# EAGLE board LIDAR_Breakout (EAGLE 9.2.2)
AUTHORS: Austin Keener; REV: 1.0; TITLE: LIDAR_BREAKOUT
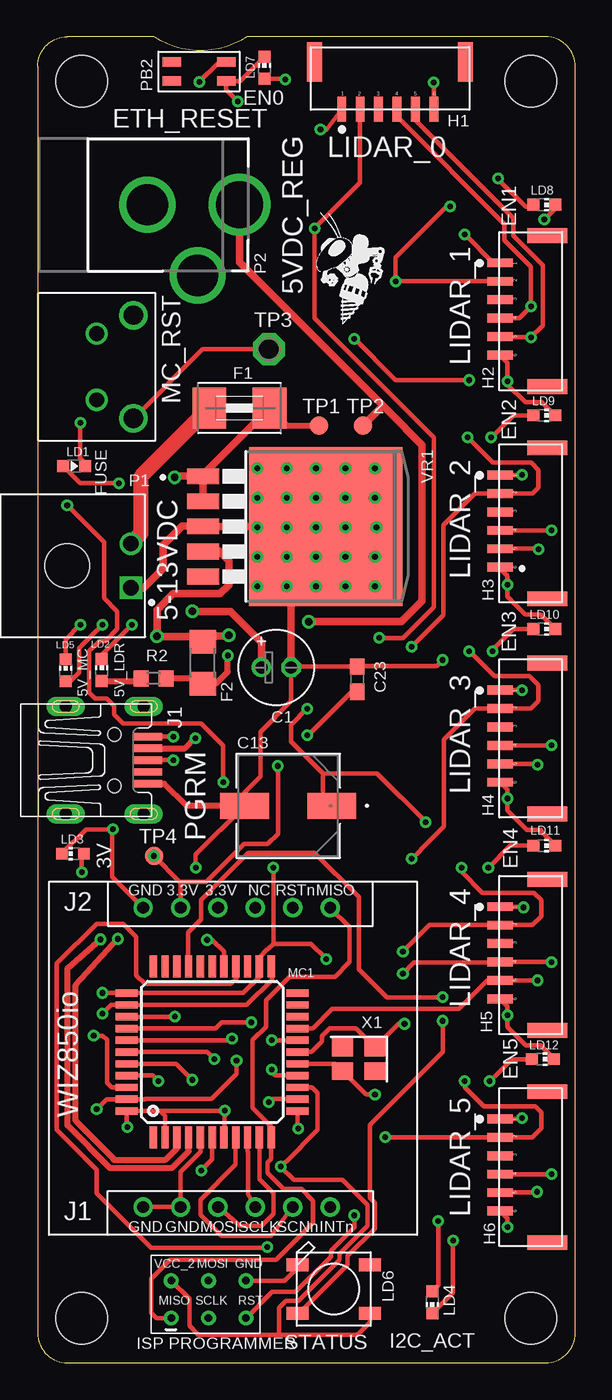
[diagram p0: board, top side]
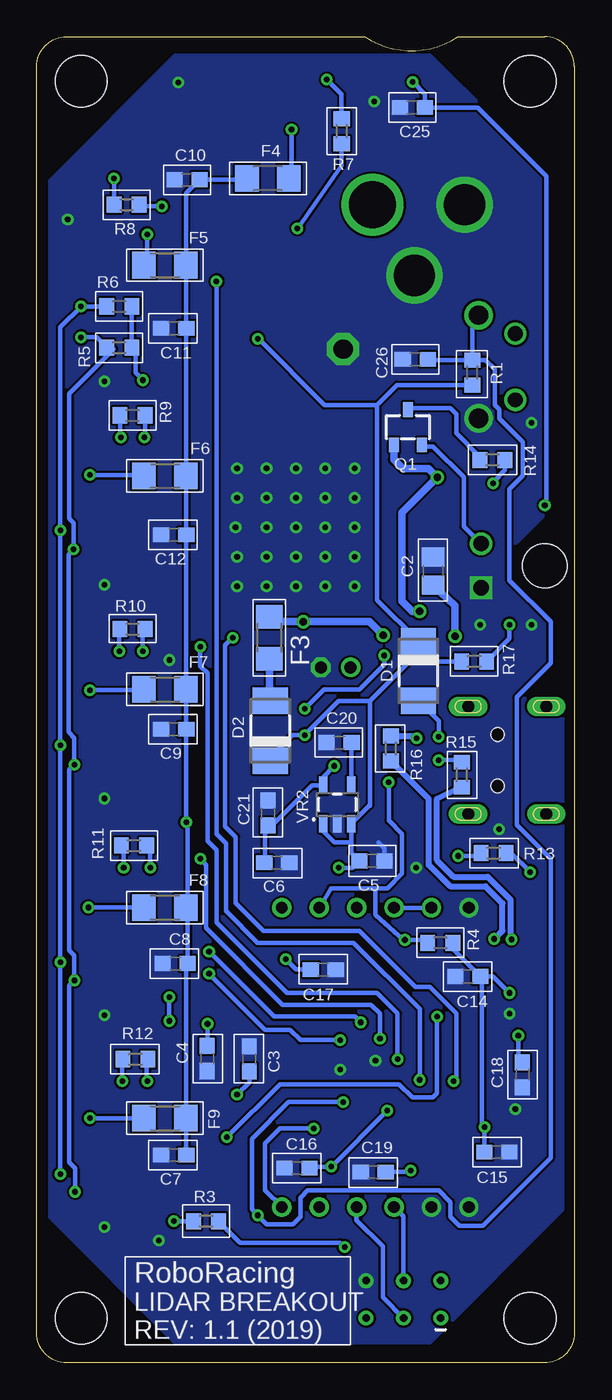
[diagram p1: board, bottom side, seen from below]

Size 36.5 x 90 mm. Coordinates in mm from the lower left corner, seen from the top.
Outline: 2,0 34.5,0 arc90 36.5,2 36.5,88 arc90 34.5,90 14.2,90 arc-67 7.9,90 2,90 arc90 0,88 0,2 arc90 2,0
Copper layers (1*16): Top 0.0356mm / dielectric 63mil / Bottom 0.0356mm
Design rules "RJ2LayerDRU *": minimum track width 6mil, minimum drill 15mil, track to track 6mil, track to pad 6mil, pad to pad 6mil, via to via 6mil, smd to smd 6mil, copper to edge 0mil, drill to drill 6mil, minimum pad ring 10mil, minimum via ring 8mil, stop-mask expansion 4mil, vias tented up to drill 0mil, thermal gap 0mil
Net classes: 0 default: width 0.203 mm; 2 diff: width 0.406 mm
Holes 3.5 mm at 3,3 33.5,3 33.5,87 3,87

## Footprints (pad centres in the part's own frame; a part is rotated, then mirrored left to right if it is on the bottom)
E2-5 = drill 0.813 pad 1.27: + -1.016,0 | drill 0.813 pad 1.27 octagon: - 1.016,0
C0805 = smd 1.3 x 1.5: 1 -0.95,0; 2 0.95,0
C0603 = smd 1.1 x 1: 1 -0.85,0; 2 0.85,0
CAP_PAN_EEE_D8 = smd 3.302 x 1.778: 1 -2.959,0; 2 2.959,0
DO-214AC = smd 1.8 x 2.4: A 2.025,0; C -2.025,0
WIZ850IO = drill 0.8: 1 6.4,1.9; 2 8.94,1.9; 3 11.48,1.9; 4 14.02,1.9; 5 16.56,1.9; 6 19.1,1.9; 7 6.4,22.22; 8 8.94,22.22; 9 11.48,22.22; 10 14.02,22.22; 11 16.56,22.22; 12 19.1,22.22
1812 = smd 2.286 x 2.794: 1 -2.046,0; 2 2.046,0
R1206 = smd 1.6 x 1.803: 1 -1.422,0; 2 1.422,0
SM06B-GHS = smd 1 x 2.7: P$1 0.25,1; P$2 10.5,1 | smd 0.6 x 1.7: P$3 8.65,4.2; P$4 7.4,4.2; P$5 6.15,4.2; P$6 4.9,4.2; P$7 3.65,4.2; P$8 2.4,4.2
UX60-MB-5S8 = smd 2 x 0.5: 1 8.65,1.6; 2 8.65,0.8; 3 8.65,0; 4 8.65,-0.8; 5 8.65,-1.6 | drill 0.8 long: M1 3.1,-3.65; M2 3.1,3.65; M3 8.4,3.65; M4 8.4,-3.65 | hole 0.9: 6.4,-1.75; 6.4,1.75
2X3_TEST_POINTS = drill 0.508: 1 -2.54,-1.27; 2 -2.54,1.27; 3 0,-1.27; 4 0,1.27; 5 2.54,-1.27; 6 2.54,1.27
CHIP-LED0603 = smd 0.8 x 0.8: A 0,-0.75; C 0,0.75
WS2812B = smd 1.5 x 0.9: 1-VDD 2.45,-1.65; 2-DOUT 2.45,1.65; 3-GND -2.45,1.65; 4-DIN -2.45,-1.65
TQFP44 = smd 1.5 x 0.5: 1 -5.8,4; 2 -5.8,3.2; 3 -5.8,2.4; 4 -5.8,1.6; 5 -5.8,0.8; 6 -5.8,0; 7 -5.8,-0.8; 8 -5.8,-1.6; 9 -5.8,-2.4; 10 -5.8,-3.2; 11 -5.8,-4; 23 5.8,-4; 24 5.8,-3.2; 25 5.8,-2.4; 26 5.8,-1.6; 27 5.8,-0.8; 28 5.8,0; 29 5.8,0.8; 30 5.8,1.6; 31 5.8,2.4; 32 5.8,3.2; 33 5.8,4 | smd 0.5 x 1.5: 12 -4,-5.8; 13 -3.2,-5.8; 14 -2.4,-5.8; 15 -1.6,-5.8; 16 -0.8,-5.8; 17 0,-5.8; 18 0.8,-5.8; 19 1.6,-5.8; 20 2.4,-5.8; 21 3.2,-5.8; 22 4,-5.8; 34 4,5.8; 35 3.2,5.8; 36 2.4,5.8; 37 1.6,5.8; 38 0.8,5.8; 39 0,5.8; 40 -0.8,5.8; 41 -1.6,5.8; 42 -2.4,5.8; 43 -3.2,5.8; 44 -4,5.8
MOLEX_0436500200 = drill 1.02 square: 1 1.5,4.32 | drill 1.02: 2 -1.5,4.32 | hole 3: 0,0
DCJACK_2MM_PTH = drill 2.8: GND 0,7.35; GNDBREAK 4.8,10.75 | drill 3.2: PWR 0,13.6
TACT_PB_RA = drill 1.3: P$1 1.5,6.5; P$2 8.5,6.5 | drill 1: P$3 2.75,4; P$4 7.25,4
RESET_PB_RA = smd 1.27 x 0.66: P$1 0.9,0.7; P$3 0.9,2 | smd 1.27 x 0.635: P$2 4.6,0.7; P$4 4.6,2
SOT-23-3 = smd 0.7 x 1: 1 -0.95,-1.2; 2 0.95,-1.2; 3 0,1.2
R0603 = smd 1 x 1.1: 1 -0.85,0; 2 0.85,0
B1,27 = smd 1.27 x 1.27: TP 0,0
P1-13 = drill 1.321 pad 2.159 octagon: TP 0,0
TO263-5 = smd 1.067 x 2.159: 1 -3.404,-5.791; 2 -1.702,-5.791; 3 0,-5.791; 4 1.702,-5.791; 5 3.404,-5.791 | smd 10.8 x 10.41: 6 0,2.54
SOT23-5 = smd 0.55 x 1.2: 1 -0.95,-1.3; 2 0,-1.3; 3 0.95,-1.3; 4 0.95,1.3; 5 -0.95,1.3
XTAL-3.2X2.5 = smd 1.4 x 1.2: 1 -1.1,-0.8; 2 1.1,-0.8; 3 1.1,0.8; 4 -1.1,0.8

## Placement (x,y rotation side)
C1  10 uF  [E2-5]  16.2,47.2 0 top
C2  47 uF  [C0805]  9.58,53.74 90 bottom
C3  9 pF  [C0603]  24.93,20.65 270 bottom
C4  9 pF  [C0603]  22.07,20.62 90 bottom
C5  1 uF  [C0603]  13.75,34.06 0 bottom
C6  2.2 uF  [C0603]  20.2,33.93 0 bottom
C7  0.1 uF  [C0603]  27.2,14.1 180 bottom
C8  0.1 uF  [C0603]  27.1,27.1 180 bottom
C9  0.1 uF  [C0603]  27.2,43 180 bottom
C10  0.1 uF  [C0603]  26.3,80.3 180 bottom
C11  0.1 uF  [C0603]  27.2,70.2 180 bottom
C12  0.1 uF  [C0603]  27.2,56.2 180 bottom
C13  680 uF  [CAP_PAN_EEE_D8]  17,37.8 180 top
C14  0.1 uF  [C0603]  7.23,26.23 180 bottom
C15  0.1 uF  [C0603]  5.25,14.29 0 bottom
C16  0.1 uF  [C0603]  18.83,13.21 180 bottom
C17  0.1 uF  [C0603]  17.05,26.68 0 bottom
C18  10 nF  [C0603]  3.52,19.54 270 bottom
C19  1 uF  [C0603]  13.66,12.95 180 bottom
C20  470 pF  [C0603]  15.97,42.1 180 bottom
C21  0.1 uF  [C0603]  20.79,37.31 90 bottom
C23  1 uF  [C0603]  21.7,46.4 90 top
C25  0.1uF  [C0603]  11,85.2 180 bottom
C26  0.1 uF  [C0603]  10.8,68.1 180 bottom
D1  APD340VRTR-G1  [DO-214AC]  10.59,46.96 270 bottom
D2  APD340VRTR-G1  [DO-214AC]  20.65,42.9 90 bottom
ETH1  WIZ850IO  [WIZ850IO]  0.76,8.66 0 top
F1  1.5 A  [1812]  13.7,64.8 0 top
F2  1A  [R1206]  11.2,47.5 270 top
F3  1A  [R1206]  20.7,49.2 270 bottom
F4  200mA  [R1206]  20.8,80.4 0 bottom
F5  200mA  [R1206]  27.8,74.5 180 bottom
F6  200mA  [R1206]  27.8,60.2 180 bottom
F7  200mA  [R1206]  27.8,45.7 180 bottom
F8  200mA  [R1206]  27.8,30.9 180 bottom
F9  200mA  [R1206]  27.8,16.6 180 bottom
H1  SM06B-GHS  [SM06B-GHS]  29.3,89.3 180 top
H2  SM06B-GHS  [SM06B-GHS]  35.6,66 90 top
H3  SM06B-GHS  [SM06B-GHS]  35.6,51.6 90 top
H4  SM06B-GHS  [SM06B-GHS]  35.6,37 90 top
H5  SM06B-GHS  [SM06B-GHS]  35.6,22.3 90 top
H6  SM06B-GHS  [SM06B-GHS]  35.6,7.9 90 top
J1  UX60-MB-5S8  [UX60-MB-5S8]  -1.2,40.9 0 top
J2  AVR_SPI_PROG_3X2TESTPOINTS  [2X3_TEST_POINTS]  11.6,4.3 0 top
LD1  RED  [CHIP-LED0603]  2.48,60.87 270 top
LD2  GREEN  [CHIP-LED0603]  4.35,47.01 0 top
LD3  GREEN  [CHIP-LED0603]  2.39,34.55 90 top
LD4  GREEN  [CHIP-LED0603]  26.8,4.1 180 top
LD5  GREEN  [CHIP-LED0603]  1.9,47 0 top
LD6  WS2812B5050  [WS2812B]  20.1,5 0 top
LD7  BLUE  [CHIP-LED0603]  15.4,87.9 0 top
LD8  BLUE  [CHIP-LED0603]  34.4,78.6 270 top
LD9  BLUE  [CHIP-LED0603]  34.4,64.3 270 top
LD10  BLUE  [CHIP-LED0603]  34.4,49.8 270 top
LD11  BLUE  [CHIP-LED0603]  34.4,35.1 270 top
LD12  BLUE  [CHIP-LED0603]  34.3,20.6 270 top
MC1  ATMEGA32U4-AU  [TQFP44]  11.85,21.09 90 top
P1  MOLEX 0436500200  [MOLEX_0436500200]  2.01,54.1 270 top
P2  [DCJACK_2MM_PTH]  0.1,78.6 270 top
PB1  ATMEGA_RESET  [TACT_PB_RA]  0,72.6 270 top
PB2  ETH_RESET  [RESET_PB_RA]  13.7,89 180 top
Q1  [SOT-23-3]  11.3,63.5 0 bottom
R1  10 kΩ  [R0603]  6.92,67.21 90 bottom
R2  330Ω  [R0603]  7.87,46.45 0 top
R3  330Ω  [R0603]  25,9.6 0 bottom
R4  10 kΩ  [R0603]  9.1,28.5 180 bottom
R5  4.7 kΩ  [R0603]  30.9,68.9 180 bottom
R6  4.7 kΩ  [R0603]  30.9,71.7 180 bottom
R7  200Ω  [R0603]  15.8,83.6 90 bottom
R8  200Ω  [R0603]  30.4,78.6 180 bottom
R9  200Ω  [R0603]  30,64.3 180 bottom
R10  200Ω  [R0603]  30,49.8 180 bottom
R11  200Ω  [R0603]  29.9,35.1 180 bottom
R12  200Ω  [R0603]  29.8,20.6 180 bottom
R13  330Ω  [R0603]  5.47,34.59 180 bottom
R14  330Ω  [R0603]  5.56,61.28 0 bottom
R15  22 Ω  [R0603]  7.63,39.91 90 bottom
R16  22 Ω  [R0603]  12.45,41.69 90 bottom
R17  330Ω  [R0603]  6.8,47.6 180 bottom
TP1  PTR1B1,27  [B1,27]  19.1,63.6 0 top
TP2  PTR1B1,27  [B1,27]  22.1,63.6 0 top
TP3  PTR1PAD1-13  [P1-13]  15.7,68.8 0 top
TP4  PTR1B1,27  [B1,27]  7.9,34.4 0 top
U$1  ROBOBUZZ0.4X  [ROBOBUZZ_0.4X]  20.7,70.5 0 top
VR1  NCP59151DS50R4G  [TO263-5]  17.01,56.76 270 top
VR2  MIC5219 3.3V  [SOT23-5]  16.1,37.89 0 bottom
X1  TSX-3225 16.0000MF18X-AC0  [XTAL-3.2X2.5]  21.8,20.6 180 top

## Library data of the parts
C1 C2 C23 = rcl; SPICEPREFIX: C
C3-C12 C14-C21 C25 C26 = resistor
C13 = 680uF_Elect_Cap; MANUFACTURER_PART_NUMBER: EEEFTJ681XAP; VENDOR: Panasonic
D1 D2 = RoboJackets-Diodes
ETH1 = WIZ850io
F1-F9 LD6 MC1 P2 = adafruit
H1-H6 = RoboJackets-Connectors
J1 = RoboJackets-Connectors; PINS: 5
J2 = SparkFun-Connectors
LD1 = RoboJackets-LEDs; DIGIKEY: 160-1447-1-ND; MPN: LTST-C191KRKT
LD2-LD5 LD7-LD12 = led
P1 = 0436500200; DESCRIPTION: Conn Power HDR 2 POS 3mm Solder RA Thru-Hole 2 Terminal 1 Port Micro-Fit 3.0Ã¢âÂ¢ Tray; MF: Molex, LLC; MP: 0436500200; PACKAGE: None
PB1 PB2 = RoboJackets-Switches
Q1 = RoboJackets-Discrete
R1-R17 = rcl; SPICEPREFIX: R
TP1-TP4 = testpad
U$1 = RoboJackets-Aesthetics
VR1 = linear
VR2 = SparkFun-IC-Power; PROD_ID: VREG-09872
X1 = RoboJackets-FreqGen

## Nets
5V_LIDAR: C7.1 C8.1 C9.1 C10.1 C11.1 C12.1 C13.1 F2.2 F4.1 F5.1 F6.1 F7.1 F8.1 F9.1 R2.2
5V_MC: C5.1 C14.1 C15.1 C16.1 C17.1 C23.1 D1.C D2.C J2.2 LD6.1-VDD MC1.2 MC1.7 MC1.14 MC1.24 MC1.34 MC1.44 R1.1 R4.1 R5.1 R6.1 R17.2 VR2.1 VR2.3
5VREG: C2.1 F2.1 F3.1 P2.PWR TP2.TP VR1.4
+3.3V: C6.1 C21.1 ETH1.8 ETH1.9 R13.2 TP4.TP VR2.5
AREF: C18.1 MC1.42
DATA_N [diff]: MC1.3 R16.1
DATA_P [diff]: MC1.4 R15.1
GND: C1.- C2.2 C3.2 C4.2 C5.2 C6.2 C7.2 C8.2 C9.2 C10.2 C11.2 C12.2 C13.2 C14.2 C15.2 C16.2 C17.2 C18.2 C19.2 C20.2 C21.2 C23.2 C25.2 C26.2 ETH1.1 ETH1.2 ETH1.7 H1.P$8 H2.P$8 H3.P$8 H4.P$8 H5.P$8 H6.P$8 J1.5 J2.6 LD1.C LD2.C LD3.C LD4.C LD5.C LD6.3-GND LD7.C LD8.C LD9.C LD10.C LD11.C LD12.C MC1.5 MC1.15 MC1.23 MC1.35 MC1.43 P1.1 P2.GND P2.GNDBREAK PB1.P$2 PB2.P$3 TP3.TP VR1.3 VR1.6 VR2.2
I2C_ACT: MC1.26 R3.2
INTN_ETH: ETH1.6 MC1.12
LDR0_EN: H1.P$4 MC1.41 R7.1
LDR0_LED: LD7.A R7.2
LDR1_EN: H2.P$4 MC1.40 R8.1
LDR1_LED: LD8.A R8.2
LDR2_EN: H3.P$4 MC1.39 R9.1
LDR2_LED: LD9.A R9.2
LDR3_EN: H4.P$4 MC1.38 R10.1
LDR3_LED: LD10.A R10.2
LDR4_EN: H5.P$4 MC1.37 R11.1
LDR4_LED: LD11.A R11.2
LDR5_EN: H6.P$4 MC1.36 R12.1
LDR5_LED: LD12.A R12.2
MISO_ETH: ETH1.12 J2.1 MC1.11
MOSI_ETH: ETH1.3 J2.4 MC1.10
N$1: D1.A J1.1
N$2: LD4.A R3.1
N$3: LD2.A R2.1
N$4: Q1.3 R14.1
N$5: LD3.A R13.1
N$6: LD1.A R14.2
N$7: D2.A F3.2
N$8: J1.2 R16.2
N$9: LD5.A R17.1
N$23: J1.3 R15.2
N$31: C20.1 VR2.4
RST_ETH: C25.1 ETH1.11 MC1.27 PB2.P$1 R4.2
RST_MC: C26.1 J2.5 MC1.13 PB1.P$1 R1.2
SCL: H1.P$6 H2.P$6 H3.P$6 H4.P$6 H5.P$6 H6.P$6 MC1.18 R6.2
SCLK_ETH: ETH1.4 J2.3 MC1.9
SCNN_ETH: ETH1.5 MC1.8
SDA: H1.P$7 H2.P$7 H3.P$7 H4.P$7 H5.P$7 H6.P$7 MC1.19 R5.2
STATUS_PWM: LD6.4-DIN MC1.30
UCAP: C19.1 MC1.6
UVCC: F1.1 P1.2 Q1.2
VCC_LDR0: F4.2 H1.P$3
VCC_LDR1: F5.2 H2.P$3
VCC_LDR2: F6.2 H3.P$3
VCC_LDR3: F7.2 H4.P$3
VCC_LDR4: F8.2 H5.P$3
VCC_LDR5: F9.2 H6.P$3
VIN: C1.+ F1.2 Q1.1 TP1.TP VR1.1 VR1.2
XTAL1: C3.1 MC1.17 X1.1
XTAL2: C4.1 MC1.16 X1.3

## Tracks (layer width: path | path; a pad name or v marks a point on that pad's centre or on a via)
5V_LIDAR  (via drill 0.38)
  Top 0.305: v26.35,36.7 23.05,40 19.36,40 | 19.36,40 17.2,42.16 17.2,43.3 v18.3,44.4 | 19.36,40 19.36,38.4 C13.1
  Top 0.406: v12.9,48 12.9,46.9 12.08,46.08 F2.2 11.2,46.45 R2.2
  Bottom 0.305: C8.1 26.25,36.6 v26.35,36.7 26.35,45.67 F7.1 26.38,43.03 C9.1 C12.1 | v18.3,44.4 17,45.7 14.6,45.7 12.9,47.4 v12.9,48 | C8.1 26.35,27 C7.1 26.35,16.57 F9.1 | C8.1 26.25,31.13 F8.1 | C11.1 C12.1 | C11.1 26.35,74.67 F5.1 | C12.1 26.35,60.07 F6.1 | C11.1 26.35,79.4 C10.1 22.32,80.3 F4.1
5V_MC  (via drill 0.38)
  Top 0.305: 8.31,17.09 MC1.44 6.05,16.05 v6.1,16 | 8.31,17.09 8.65,16.75 MC1.2 | v4.4,25.1 6.04,25.1 MC1.34 13.94,25.09 15.05,26.2 MC1.24 15.05,27.52 15.57,28.04 15.6,28.04 16,28.44 | MC1.7 12.7,15.34 v12.7,17.1 9.3,17.1 9.29,17.09 8.31,17.09 | v19.6,27.4 18.56,28.44 16,28.44 | v16,33.6 16,28.44 | v29.3,66.7 24.3,66.7 v21.5,69.5 | MC1.14 18.61,18.69 19,18.3 19,15.8 16.85,13.65 16.84,13.65 v16.5,13.31 17.41,12.4 20.7,12.4 22.4,10.7 22.4,9.3 20.5,7.4 20.5,7 17.7,4.21 16.87,4.21 16.4,3.73 16.4,1.9 | v18.3,42.6 18.4,42.6 21.35,45.55 C23.1 | LD6.1-VDD 22.55,2.75 21.7,1.9 16.4,1.9 | 16.4,1.9 10.9,1.9 10.3,2.5 10.3,4.33 J2.2
  Bottom 0.305: D2.C 20.65,41.08 19.12,42.6 18.32,42.6 | 18.32,42.6 16.01,44.91 13.89,44.91 | v19.6,27.4 18.88,26.68 C17.1 | 13.39,65 13.39,51.78 D1.C | R1.1 12.04,66.36 13.39,65.01 13.39,65 | 15.15,35.3 VR2.3 13.94,37.8 13.89,37.8 13.89,44.91 | 15.15,35.3 15.15,34.61 C5.1 15.06,33.6 v16,33.6 | 15.15,35.3 16.3,35.3 17.05,36.05 VR2.1 | D1.C 10.59,48.21 13.89,44.91 | R4.1 8.25,28.1 C14.1 | C15.1 v6.11,15.99 v6.1,16 6.28,16.18 6.28,26.13 C14.1 | 18.32,42.6 v18.3,42.6 | R6.1 R5.1 29.8,68.65 29.8,67.2 v29.3,66.7 | v12.7,17.1 v12.71,17.1 v16.5,13.31 17.88,13.31 C16.1 | v4.4,25.1 5.53,26.23 C14.1 | R17.2 9.4,47.6 10.59,48.79 D1.C | v21.5,69.5 21.46,69.5 16.96,65 13.39,65
5VREG  (via drill 0.5)
  Top 0.508: VR1.4 11.18,55.1 12.3,55.1 13,54.4 13,52.8 12.4,52.2 9.2,52.2 8.1,51.1 v8.1,49.3 10.82,49.3 F2.1 11.6,49.32 12.92,49.32 v12.99,49.39 | TP2.TP 23.45,64.95 23.6,64.8 | 23.6,64.8 23.85,64.55 26.1,62.3 26.1,51.7 24.7,50.3 v18.4,50.3 | P2.PWR 13.7,74.7 23.6,64.8
  Bottom 0.406: F3.1 20.38,50.3
  Bottom 0.508: v12.99,49.39 13.9,50.3 v18.4,50.3 20.38,50.3 | C2.1 8.1,51.41 v8.1,49.3
+3.3V  (via drill 0.38)
  Top 0.305: 9.65,32.65 11.45,32.65 14,35.2 15.6,35.2 16.31,35.91 v16.31,40.51 | 9.65,32.65 9.7,32.6 ETH1.8 | 9.65,32.65 TP4.TP
  Bottom 0.305: R13.2 6.52,34.39 6.53,34.4 TP4.TP | v16.31,40.51 17.05,39.76 VR2.5 17.81,39.19 20.8,36.2 21,36.2 | C6.1 21,33.98 21,36.2 | C21.1 21,36.25 21,36.2 | ETH1.8 ETH1.9
  other vias: 7.9,34.4
AREF  (via drill 0.38)
  Top 0.305: MC1.42 5.01,18.69 4.7,19 4.7,21.9 4.4,22.2 v3.8,22.2
  Bottom 0.305: v3.8,22.2 3.8,20.67 C18.1
DATA_N  (via drill 0.38)
  Top 0.406: MC1.3 9.45,14.55 8.68,13.78 5.15,13.78 5.15,13.83 2.58,16.4 2.58,25.64 v5.43,28.77
  Bottom 0.406: R16.1 9.88,38.27 9.88,33.78 8.43,32.33 6.03,32.33 4.88,31.18 4.88,29.32 v5.43,28.77
DATA_P  (via drill 0.38)
  Top 0.406: MC1.4 10.25,14.36 9.11,13.22 4.9,13.22 2.02,16.1 2.02,26.77 v4.27,28.73
  Bottom 0.406: R15.1 7.75,39.06 9.32,38.27 9.32,34.1 8.2,32.98 5.88,32.98 4.32,31.42 4.32,28.73 v4.27,28.73
GND  (via drill 0.38)
  Top 0.203: 31.9,53.4 31.9,53.5 H3.P$8
  Top 0.305: v4.4,23.7 4.99,24.29 MC1.35 14.19,24.29 15.9,26 15.9,26.8 15.92,26.82 MC1.23 | v4,17.2 4.69,17.89 MC1.43 7.29,17.89 7.3,17.9 11.8,17.9 13.5,19.6 v13.5,20.5 | MC1.5 11.05,14.3 9.7,12.95 ETH1.2 ETH1.1 | 15.6,56.76 15.7,56.66 19.45,56.66 VR1.6 18.96,56.76 v18.9,56.7 | v2.9,63.8 2.9,61.4 3.33,60.97 LD1.C | v34.4,77.6 35.15,78.35 LD8.C | 31.5,53.8 31.9,53.4 v31.9,52.8 31.9,52 33.1,50.8 34.15,50.8 LD10.C | H4.P$8 31.9,38.9 v31.9,38.3 31.9,37.47 33.22,36.15 34.16,36.15 34.2,36.1 34.2,36.05 LD11.C | H5.P$8 31.9,24.2 v31.9,23.6 31.9,22.8 33.16,21.55 34.16,21.55 35.05,20.65 LD12.C | MC1.15 16.11,19.49 15.9,19.7 v15.9,19.9 | H6.P$8 31.9,9.8 v31.9,9.2 | v27.5,47.7 27.1,47.3 21.75,47.3 C23.2 17.27,47.25 C1.- 17.22,44.9 15.12,42.8 15.12,39.78 14.04,38.7 C13.2 10.73,34.49 v10.73,33.6 | LD3.C 3.29,36.2 v5.1,36.2 5.1,36.07 5.06,36.11 5.06,32.98 ETH1.7 | v28.2,8.3 28.2,4.75 LD4.C | H2.P$8 31.9,67.9 v31.9,66.6 31.9,66.4 33.1,65.2 34.25,65.2 LD9.C | J2.6 16.77,5.57 17.65,6.45 LD6.3-GND | v26.9,86.9 H1.P$8 | v13.6,85.6 12.8,86.4 PB2.P$3 13.75,87 LD7.C | PB1.P$2 11.2,68.8 TP3.TP | v6.4,50.1 4.35,48.05 LD2.C | LD5.C 1.9,49.1 v2.9,50.1
  Top 0.406: C13.2 10.1,37.8 8.6,39.3 J1.5
  Top 0.508: 15.6,56.76 VR1.3 11.19,56.8 9.8,56.8 8.5,55.5 8.5,53.9 7.2,52.6 P1.1 | C1.- 17.22,52.38 v16.9,52.7
  Bottom 0.305: 13.3,35.3 12.9,34.9 C5.2
  other vias: 14.9,60.7 16.9,60.7 18.9,60.7 20.9,60.7 14.9,58.7 14.9,56.7 14.9,54.7 14.9,52.7 16.9,54.7 16.9,56.7 20.9,56.7 23,56.7 18.9,54.7 20.9,54.7 22.9,54.7 16.9,58.7 18.9,58.7 20.9,58.7 22.9,58.7 22.9,60.7 18.9,52.7 20.9,52.7 22.9,52.7
  pour Bottom (no thermals): 9.8,88.7 0.9,79.9 0.9,58.73 4.2,55.43 4.2,52.7 0.8,49.3 0.8,10.4 9.8,1.4 27.1,1.4 35.6,9.9 35.6,80.2 27.1,88.7
I2C_ACT  (via drill 0.38)
  Top 0.305: MC1.26 13.5,26.84 13.5,26.1 13.1,25.7 7.3,25.7 6.7,26.3 6.7,28.9 5.8,29.8 4,29.8 1.3,27.1 1.3,15.8 4,13.1 4,11.5 7.7,7.8 15.55,7.8 v15.6,7.85
  Bottom 0.305: R3.2 22.7,8.15 15.9,8.15 v15.6,7.85
INTN_ETH  (via drill 0.38)
  Top 0.305: MC1.12 17.65,15.95 v17.7,15.9
  Bottom 0.305: v17.7,15.9 20,15.9 21,14.9 21,11.7 ETH1.6
LDR0_EN  (via drill 0.38)
  Top 0.305: MC1.41 7.81,19.49 v8.2,19.1 | v23.2,49.2 24.8,49.2 26.9,51.3 26.9,62.8 18.8,70.9 v18.8,77 21.9,80.1 H1.P$4
  Bottom 0.305: v8.2,19.1 8,19.3 8,23.7 9.8,25.5 10.8,25.5 14.6,29.3 21.1,29.3 23,31.2 23,35.7 23.7,36.4 23.7,48.7 v23.2,49.2 | v18.8,77 18.77,77 15.8,81.24 R7.1
LDR0_LED  (via drill 0.38)
  Top 0.305: v16.8,87.1 16.75,87.15 LD7.A
  Bottom 0.305: v16.8,87.1 15.8,86.1 R7.2
LDR1_EN  (via drill 0.38)
  Top 0.305: H2.P$4 v24.3,73.4 24.3,75 27.8,78.5 v28,78.5 | v10.5,19.2 9.41,20.29 MC1.40
  Bottom 0.305: v24.3,73.4 24.3,35.9 23.65,35.25 23.65,30.65 21.5,28.5 15,28.5 10.5,24 v10.5,19.2 | v28,78.5 29.45,78.5 R8.1
LDR1_LED  (via drill 0.38)
  Top 0.305: v31.26,80.4 31.26,80.35 33.16,78.46 33.51,78.46 LD8.A
  Bottom 0.305: v31.26,80.4 v31.25,80.39 R8.2
LDR2_EN  (via drill 0.38)
  Top 0.305: v12,20.6 11.51,21.09 MC1.39 | v25.4,48.6 27.55,50.75 27.55,56.85 29.7,59 H3.P$4 33.6,59 34,59.4 34,60.6 33.51,61.09 30.91,61.09 v29.2,62.8
  Bottom 0.305: v12,20.6 12,23.7 13.4,25.1 19.5,25.1 24.3,29.9 24.3,34.8 24.9,35.4 24.9,46.8 25.4,47.3 v25.4,48.6 | R9.1 29.15,62.85 v29.2,62.8
LDR2_LED  (via drill 0.38)
  Top 0.305: LD9.A 32.3,64.3 v30.8,62.8
  Bottom 0.305: R9.2 30.85,62.85 v30.8,62.8
LDR3_EN  (via drill 0.38)
  Top 0.305: v13.2,22 13.09,21.89 MC1.38 | v25.4,34.2 26.65,35.45 27.6,36.4 27.6,42.3 29.7,44.4 H4.P$4 33.5,44.4 34,44.9 34,46 33.4,46.6 31,46.6 v29.3,48.3
  Bottom 0.305: v13.2,22 13.2,23.7 13.8,24.3 19.8,24.3 25,29.5 25,33.8 v25.4,34.2 | R10.1 29.3,49.75 v29.3,48.3
LDR3_LED  (via drill 0.38)
  Top 0.305: v30.9,48.3 30.9,48.4 32.3,49.8 LD10.A
  Bottom 0.305: R10.2 30.9,49.78 v30.9,48.3
LDR4_EN  (via drill 0.38)
  Top 0.305: MC1.37 12.09,22.69 12.5,23.1 v14.5,23.1 | v28.8,33.6 28.8,33.3 30.2,31.9 33.7,31.9 34.2,31.4 34.2,30.3 33.6,29.7 H5.P$4 26.6,29.7 v24.8,27.9
  Bottom 0.305: v24.8,27.9 20.4,23.5 14.9,23.5 v14.5,23.1 | v28.8,33.6 28.8,34.85 R11.1
LDR4_LED  (via drill 0.38)
  Top 0.305: LD11.A 32.1,35.1 v30.6,33.6
  Bottom 0.305: v30.6,33.6 30.6,34.95 R11.2
LDR5_EN  (via drill 0.38)
  Top 0.305: MC1.36 v9.31,23.49 | v29,19.1 29,18.7 30.3,17.4 33.8,17.4 34.2,17 34.2,15.9 33.6,15.3 H6.P$4 v23.6,15.3
  Bottom 0.305: v9.31,23.49 9.31,18.29 9.6,18 11,18 11.9,18.9 20,18.9 v23.6,15.3 | R12.1 29.05,20.5 29.05,19.05 v29,19.1
LDR5_LED  (via drill 0.38)
  Top 0.305: LD12.A 32.2,20.6 v30.7,19.1
  Bottom 0.305: R12.2 30.7,20.55 v30.7,19.1
MISO_ETH
  Top 0.305: ETH1.12 21.17,29.57 21.17,27.2 20.17,26.2 17.1,26.2 15.5,24.6 15.5,22.8 14.6,21.9 14.6,17.3 15.85,16.05 MC1.11 15.85,13.85 15.6,13.6 15.6,12.9 16.7,11.8 17.9,11.8 18.7,11 18.7,9.5 16.2,7 9,7 7.7,5.7 7.7,3.4 8.07,3.03 J2.1
MOSI_ETH
  Top 0.305: ETH1.3 13.74,9.3 15.2,9.3 16,10.1 16,11.5 15.05,12.45 MC1.10
  Bottom 0.305: J2.4 11.6,9.93 ETH1.3
N$1  (via drill 0.38)
  Top 0.305: v9.2,42.5 J1.1
  Bottom 0.305: D1.A 9.2,43.55 v9.2,42.5
N$2  (via drill 0.38)
  Top 0.305: v27.2,9.6 27.2,5.25 LD4.A
  Bottom 0.305: R3.1 v27.2,9.6
N$3
  Top 0.406: LD2.A 6.83,46.26 R2.1
N$4
  Bottom 0.305: R14.1 6.41,61.48 8.02,63.08 8.02,64.4 8.41,64.8 11.2,64.8 Q1.3
N$5  (via drill 0.38)
  Top 0.305: LD3.A 3,34.41 v3,33.3
  Bottom 0.305: R13.1 4.29,34.59 v3,33.3
N$6  (via drill 0.38)
  Top 0.305: LD1.A 2.9,59.7 v5.5,59.7
  Bottom 0.305: R14.2 4.71,60.58 5.5,59.78 v5.5,59.7
N$7
  Bottom 0.508: D2.A 20.7,44.98 F3.2
N$8  (via drill 0.38)
  Top 0.406: v10.7,42.4 10,41.7 J1.2
  Bottom 0.406: R16.2 10.84,42.54 v10.7,42.4
N$9  (via drill 0.38)
  Top 0.305: LD5.A 2.2,46.25 2.8,46.85 2.8,48.5 v4.4,50.1
  Bottom 0.305: R17.1 4.4,49.15 v4.4,50.1
N$23  (via drill 0.38)
  Top 0.305: v9.2,40.9 J1.3
  Bottom 0.305: R15.2 7.78,40.9 v9.2,40.9
N$31
  Bottom 0.305: VR2.4 15.15,42.07 C20.1
RST_ETH  (via drill 0.38)
  Top 0.305: v2,58.2 4.5,55.7 4.5,51.9 5.4,51 5.4,49.8 4.6,49 4.2,49 3.5,48.3 3.5,45.5 3.9,45.1 4.68,45.1 5.2,44.58 5.2,44 5.8,43.4 11.1,43.4 12.6,41.9 v12.6,39.4 | MC1.27 12.65,27.9 11.85,28.7 v11.5,28.7 | v10.97,86.94 12.23,88.2 12.7,88.2 PB2.P$1
  Bottom 0.305: R4.2 10.15,28.7 v11.5,28.7 11.61,28.7 13.5,30.4 13.5,32.2 | 13.5,32.2 12.7,32.2 11.7,33.2 11.7,35.9 12.6,36.8 v12.6,39.4 | 13.5,32.2 16.52,32.2 ETH1.11 | v2,58.2 1.9,58.3 1.9,80.55 6.55,85.2 C25.1 10.15,86.12 v10.97,86.94
RST_MC  (via drill 0.38)
  Top 0.305: MC1.13 17.64,17.9 15.9,17.9 v15.7,17.7 | J2.5 15.91,4.8 17.5,4.8 19.9,7.2 19.9,7.6 21.5,9.2 v21.5,10
  Bottom 0.305: v15.7,17.7 19.4,17.7 21.9,15.2 21.9,10.4 v21.5,10 20.9,9.4 19.1,9.4 18.6,9.9 18.6,11.2 18.1,11.7 9.2,11.7 8.4,10.9 8.4,9.9 7.8,9.3 6.2,9.3 1.6,13.9 1.6,34.2 3.9,36.5 3.9,45.2 1.6,47.5 1.6,50.3 4.41,53.1 4.41,59.29 3.5,60.2 3.5,62.5 5.1,64.1 5.1,64.7 5.4,65 5.4,67.44 6.02,68.06 R1.2 | PB1.P$1 6.5,71.05 6.92,70.63 R1.2 | C26.1 9.91,68.06 R1.2
SCL  (via drill 0.38)
  Top 0.305: MC1.18 15.91,21.89 v15.9,21.9 | H4.P$6 v34.9,41.9 | v34.9,27.2 H5.P$6 31.36,27.16 25.55,27.16 v24.8,26.4 | v34.9,12.8 H6.P$6 | H2.P$6 32.7,70.9 v33.5,71.7 33.5,74.4 31.7,76.2 31.7,77.3 24.4,84.6 H1.P$6 | v34.9,56.5 H3.P$6
  Bottom 0.305: R6.2 v33.5,71.7 34.9,70.3 v34.9,56.5 v34.9,41.9 v34.9,27.2 v34.9,12.8 | v24.8,26.4 21,22.6 19.3,22.6 18.6,21.9 v15.9,21.9
SCLK_ETH
  Top 0.305: MC1.9 14.25,14.35 14.3,14.3 14.3,11.44 ETH1.4
  Bottom 0.305: J2.3 13,4.43 13,7.9 14.78,9.68 ETH1.4
SCNN_ETH
  Top 0.305: MC1.8 13.45,13.45 11.05,11.05 11.05,10.05 12.5,8.6 15.85,8.6 ETH1.5
SDA  (via drill 0.38)
  Top 0.305: H3.P$7 33.95,55.25 v34,55.2 | v33.95,40.6 33.75,40.65 H4.P$7 | v33.95,25.95 H5.P$7 30.55,25.95 28.6,24 20,24 18.69,22.69 MC1.19 | v33.9,11.6 33.85,11.55 H6.P$7 | H2.P$7 31.45,69.6 v33.5,69.6 34.3,70.4 34.3,74.5 32.3,76.5 32.3,77.7 25.65,84.35 H1.P$7
  Bottom 0.305: v33.9,11.6 33.9,13.2 34.3,13.6 34.3,25.6 v33.95,25.95 33.95,27.65 34.3,28 34.3,40.26 33.96,40.6 v33.95,40.6 33.95,42.41 34.34,42.8 34.34,54.86 v34,55.2 34,57 34.3,57.3 34.3,65.79 31.27,68.81 31.84,68.81 R5.2 32.45,69.6 v33.5,69.6
STATUS_PWM  (via drill 0.38)
  Top 0.305: MC1.30 10.2,26.93 10.2,29.2 11.1,30.1 11.1,31.4 14.3,34.6 18.8,34.6 21.8,31.6 21.8,26.7 23.7,24.8 v27.5,24.8 | v27.5,23.2 27.5,21.1 22.55,16.15 22.55,11.2 22.9,10.85 22.9,9.1 21.05,7.25 21.05,6.65 17.75,3.35 LD6.4-DIN
  Bottom 0.305: v27.5,24.8 v27.5,23.2
UCAP  (via drill 0.38)
  Top 0.305: v11.1,13.05 11.85,13.8 MC1.6
  Bottom 0.305: C19.1 11.2,12.95 v11.1,13.05
UVCC
  Top 1.016: P1.2 7,56.27 7,60.15 F1.1
  Bottom 0.305: Q1.2 10.25,62.2 9.6,62.2 7.5,60.1 7.5,56.77 P1.2
VCC_LDR0  (via drill 0.38)
  Top 0.305: H1.P$3 19.62,83.7 v19.2,83.7
  Bottom 0.305: v19.2,83.7 19.2,80.58 F4.2
VCC_LDR1  (via drill 0.38)
  Top 0.305: v29,76.6 30.95,74.65 H2.P$3
  Bottom 0.305: v29,76.6 29,74.52 F5.2
VCC_LDR2  (via drill 0.38)
  Top 0.305: v32.9,60.26 v32.89,60.25 H3.P$3
  Bottom 0.305: v32.9,60.26 29.38,60.26 F6.2
VCC_LDR3  (via drill 0.38)
  Top 0.305: v32.9,45.65 H4.P$3
  Bottom 0.305: v32.9,45.65 29.28,45.65 F7.2
VCC_LDR4  (via drill 0.38)
  Top 0.305: v33,30.9 32.95,30.95 H5.P$3
  Bottom 0.305: F8.2 v33,30.9
VCC_LDR5  (via drill 0.38)
  Top 0.305: v32.9,16.6 32.85,16.55 H6.P$3
  Bottom 0.305: F9.2 v32.9,16.6
VIN  (via drill 0.5)
  Top 0.406: F1.2 16.95,63.6 TP1.TP
  Top 0.508: VR1.2 VR1.1 | C1.+ 15.2,47.22 15.2,48.9 13.1,51 v10.5,51 | VR1.1 9.37,60.17 v9.3,60.1 | VR1.1 11.22,60.27 F1.2
  Bottom 0.508: v10.5,51 11,51 11.7,51.7 11.7,57.7 v9.3,60.1 9.9,60.7 11.65,60.7 12.25,61.3 Q1.1
XTAL1  (via drill 0.38)
  Top 0.305: v24.9,23 24.5,23 X1.1 21.6,22.7 19.8,22.7 19.3,22.2 19.3,21.8 18.59,21.09 MC1.17
  Bottom 0.305: v24.9,23 24.9,21.53 C3.1
XTAL2  (via drill 0.38)
  Top 0.305: MC1.16 20.21,20.29 X1.3 22.3,18.2 v22.9,18.2
  Bottom 0.305: v22.9,18.2 22.07,19.03 C4.1

## Text on the board
tPlace: EN0 | ETH_RESET | 5VDC_REG | LIDAR_0 | EN1 | LIDAR_1 | MC_RST | EN2 | FUSE | 5-13VDC | LIDAR_2 | EN3 | 5V_LDR | 5V_MC | PGRM | LIDAR_3 | EN4 | 3V | LIDAR_4 | EN5 | LIDAR_5 | VCC_2 | MOSI | GND | MISO | SCLK | RST | STATUS | I2C_ACT | ISP PROGRAMMER
bPlace: RoboRacing | LIDAR BREAKOUT / REV: 1.1 (2019)